# EAGLE board TinkerCAD_VaralAutomatico (EAGLE 9.7.0)

Size 82.4 x 98.67 mm. Coordinates in mm from the lower left corner, seen from the top.
Outline: 0,0 82.4,0 82.4,98.67 0,98.67 0,0
Copper layers (1*16): Top 0.035mm / dielectric 1.5mm / Bottom 0.035mm
Design rules "default": minimum track width 6mil, minimum drill 0.35mm, track to track 6mil, track to pad 6mil, pad to pad 6mil, via to via 6mil, smd to smd 6mil, copper to edge 40mil, drill to drill 6mil, minimum pad ring 10mil, minimum via ring 8mil, stop-mask expansion 4mil, vias tented up to drill 0mil, thermal gap 10mil

## Footprints (pad centres in the part's own frame; a part is rotated, then mirrored left to right if it is on the bottom)
LEDRD254W60D565H860B = drill 0.981 pad 1.581: 1 -1.27,0; 2 1.27,0
LEDRD254W60D565H860B_G = drill 0.981 pad 1.581: 1 -1.27,0; 2 1.27,0
RESAD1016W63L850D250B = drill 0.83 pad 1.43: 1 -5.08,0; 2 5.08,0
SEN-13322 = drill 1.016 long: 1 -2.54,0; 2 0,0; 3 2.54,0
SG90 = drill 1.016 long: 1 -2.54,0; 2 0,0; 3 2.54,0
ARDUINO-UNO-R3-SHIELD = drill 1.016 pad 1.88: 3.3V 24.13,-2.54; 5V 24.13,0; A0 24.13,12.7; A1 24.13,15.24; A2 24.13,17.78; A3 24.13,20.32; A4 24.13,22.86; A5 24.13,25.4; AREF -24.13,-13.97; D2 -24.13,20.32; D3 -24.13,17.78; D4 -24.13,15.24; D5 -24.13,12.7; D6 -24.13,10.16; D7 -24.13,7.62; D8 -24.13,3.81; D9 -24.13,1.27; D10 -24.13,-1.27; D11 -24.13,-3.81; D12 -24.13,-6.35; D13 -24.13,-8.89; GND@0 24.13,2.54; GND@1 24.13,5.08; GND@2 -24.13,-11.43; IOREF 24.13,-7.62; NC 24.13,-10.16; RES 24.13,-5.08; RX -24.13,25.4; SCL -24.13,-19.05; SDA -24.13,-16.51; TX -24.13,22.86; VIN 24.13,7.62

## Placement (x,y rotation side)
DCOM_CHUVA  RED  [LEDRD254W60D565H860B]  57.71,90.56 180 top
DSEM_CHUVA  GREEN  [LEDRD254W60D565H860B_G]  70.36,90.76 180 top
R1  220k  [RESAD1016W63L850D250B]  58.98,85.48 90 top
R2  220k  [RESAD1016W63L850D250B]  71.63,85.68 90 top
SEN1  SEN-13322  [SEN-13322]  34.21,7.62 0 top
SERVO1  SERVOSG90  [SG90]  60.93,9.47 0 top
U1  ARDUINO-UNO-R3-SHIELD  [ARDUINO-UNO-R3-SHIELD]  47.88,42.39 270 top

## Library data of the parts
DCOM_CHUVA = Tinkercad; CATEGORY: Opto-Electronic; SUB-CATEGORY: LED; VALUE: LED_RED
DSEM_CHUVA = Tinkercad; CATEGORY: Opto-Electronic; SUB-CATEGORY: LED; VALUE: LED_GREEN
R1 R2 SEN1 SERVO1 U1 = Tinkercad

## Nets
DCOM_CHUVA_A: DCOM_CHUVA.1 R1.2
DSEM_CHUVA_A: DSEM_CHUVA.1 R2.2
U1_5V: SEN1.1 SERVO1.2 U1.5V
U1_D2: SEN1.3 U1.D2
U1_D4: DSEM_CHUVA.2 U1.D4
U1_D5: DCOM_CHUVA.2 U1.D5
U1_D9: SERVO1.3 U1.D9
U1_GND: R1.1 R2.1 SEN1.2 SERVO1.1 U1.GND@0 U1.GND@1 U1.GND@2

## Tracks (layer width: path | path; a pad name or v marks a point on that pad's centre or on a via)
DCOM_CHUVA_A  (1 unrouted)
DSEM_CHUVA_A  (1 unrouted)
U1_5V  (2 unrouted)
U1_D2  (1 unrouted)
U1_D4  (1 unrouted)
U1_D5  (1 unrouted)
U1_D9  (1 unrouted)
U1_GND  (6 unrouted)